# EAGLE board Camara_V4 (EAGLE 7.6.0)
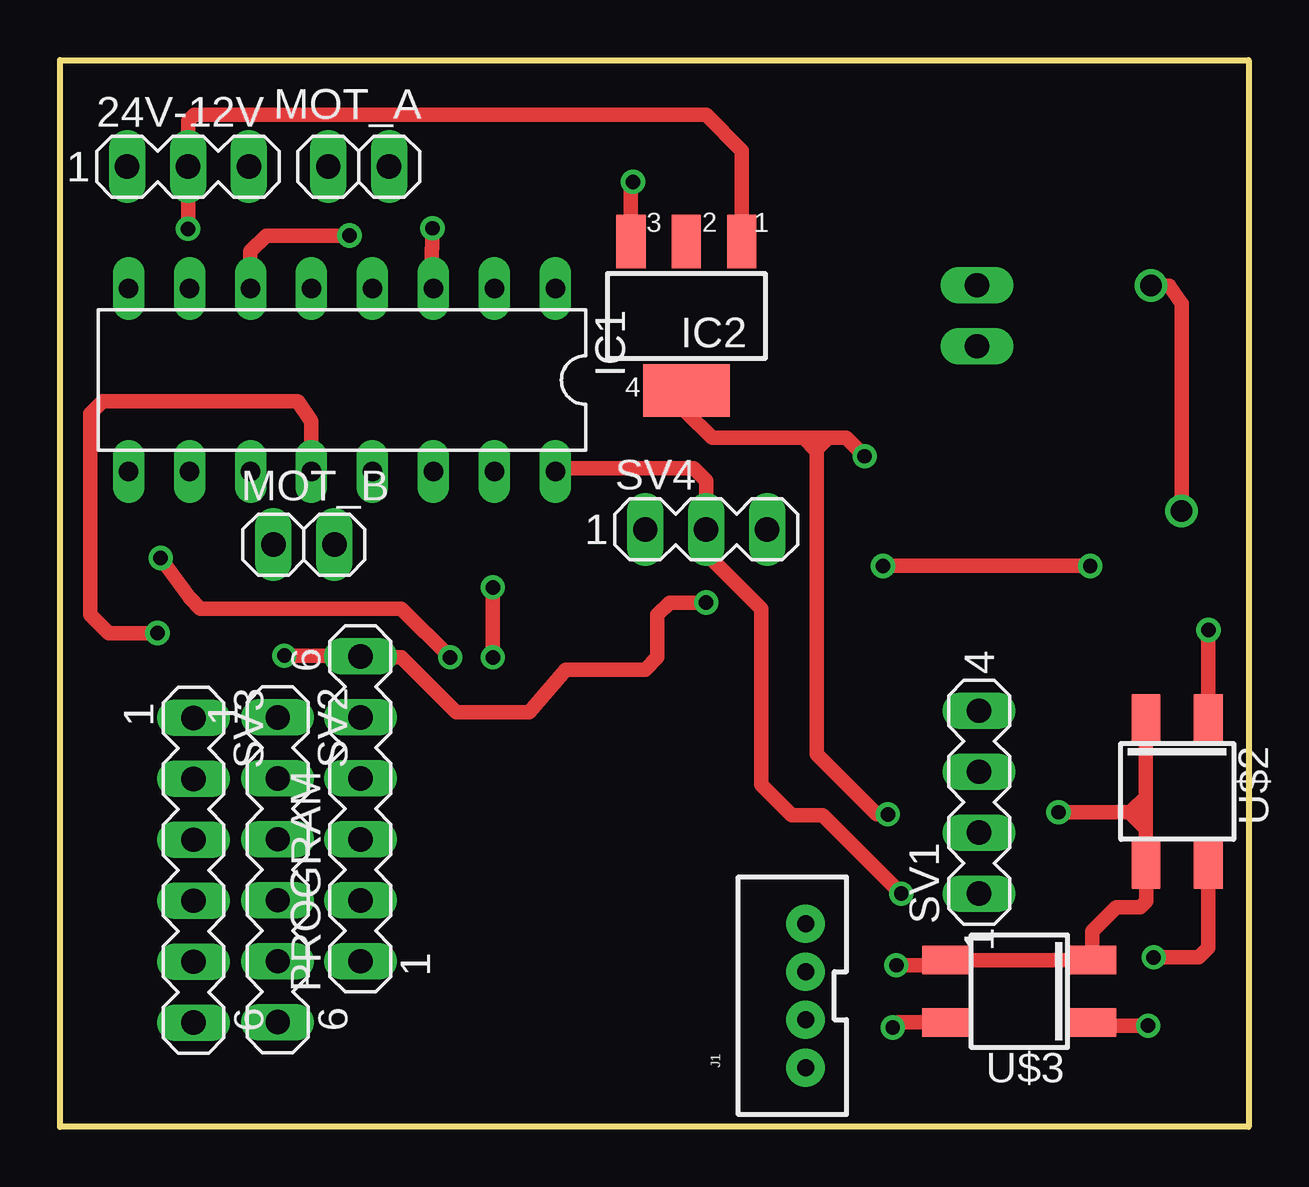
[diagram p0: board, top side]
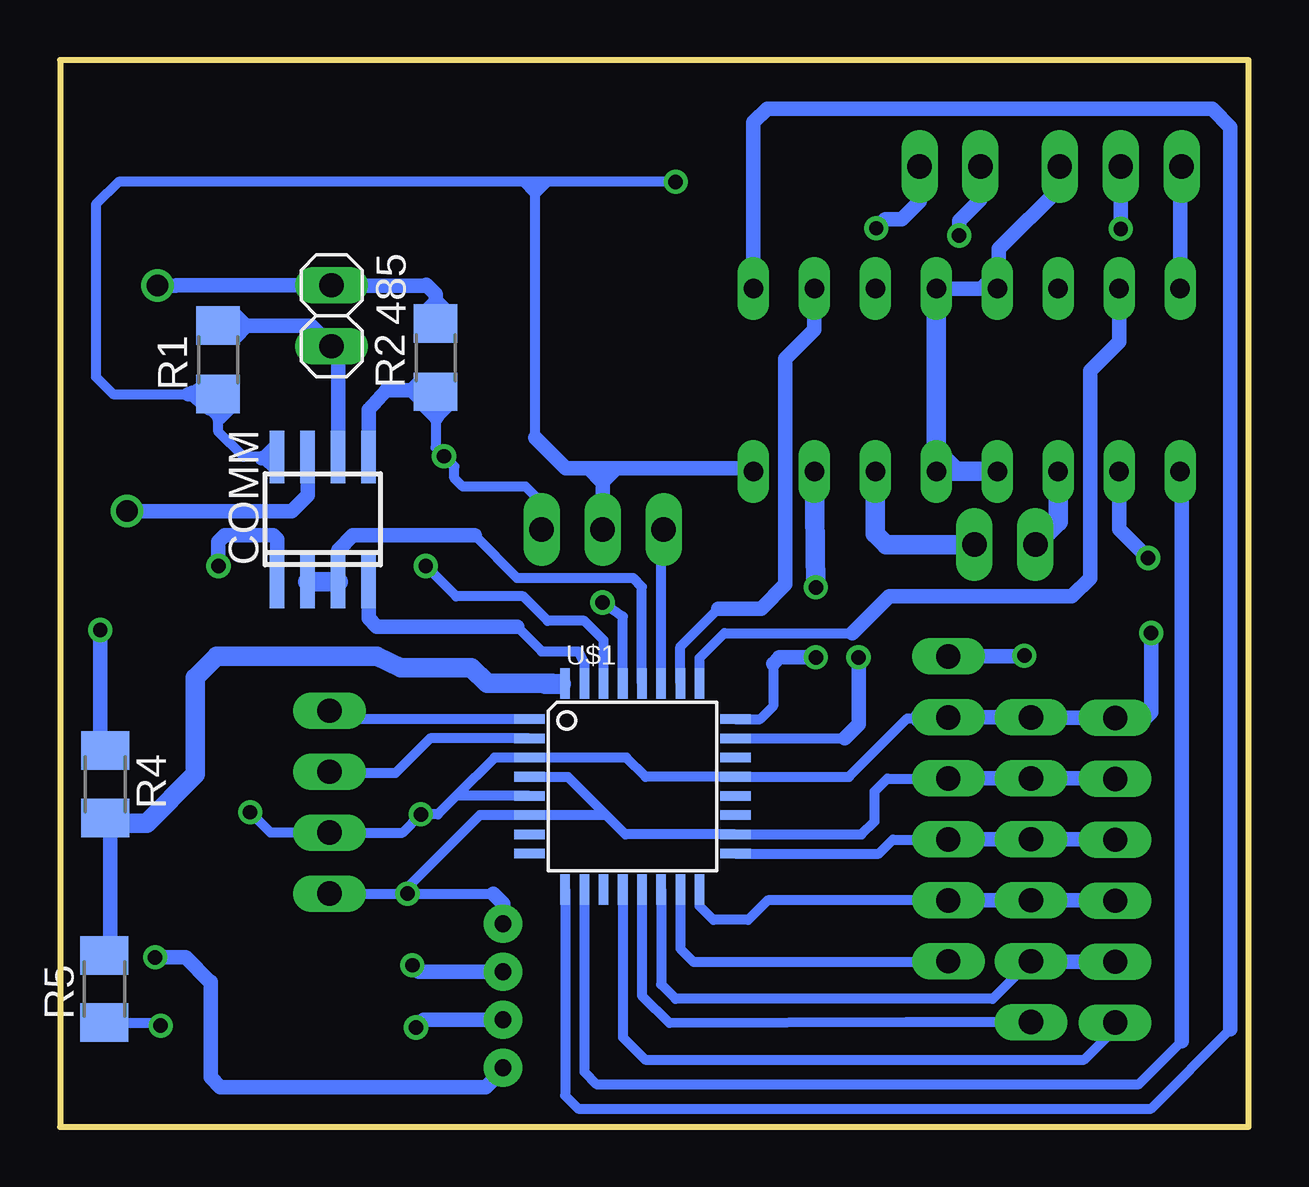
[diagram p1: board, bottom side, seen from below]

Size 49.53 x 44.45 mm. Coordinates in mm from the lower left corner, seen from the top.
Outline: 0,44.45 49.53,44.45 49.53,0 0,0 0,44.45
Copper layers (1*16): Top 0.035mm / dielectric 1.5mm / Bottom 0.035mm
Design rules "default": minimum track width 10mil, minimum drill 24mil, track to track 8mil, track to pad 8mil, pad to pad 8mil, via to via 8mil, smd to smd 8mil, copper to edge 40mil, drill to drill 8mil, minimum pad ring 10mil, minimum via ring 8mil, stop-mask expansion 4mil, vias tented up to drill 0mil, thermal gap 10mil

## Footprints (pad centres in the part's own frame; a part is rotated, then mirrored left to right if it is on the bottom)
MA03-1 = drill 1.016 long: 1 -2.54,0; 2 0,0; 3 2.54,0
CINVESTAV_1X02 = drill 1.016 long: 1 -1.27,0; 2 1.27,0
CINVESTAV_SOIC8 = smd 0.6 x 2.2: 1 -1.905,-2.6; 2 -0.635,-2.6; 3 0.635,-2.6; 4 1.905,-2.6; 5 1.905,2.6; 6 0.635,2.6; 7 -0.635,2.6; 8 -1.905,2.6
DIL16 = drill 0.813 long: 1 -8.89,-3.81; 2 -6.35,-3.81; 3 -3.81,-3.81; 4 -1.27,-3.81; 5 1.27,-3.81; 6 3.81,-3.81; 7 6.35,-3.81; 8 8.89,-3.81; 9 8.89,3.81; 10 6.35,3.81; 11 3.81,3.81; 12 1.27,3.81; 13 -1.27,3.81; 14 -3.81,3.81; 15 -6.35,3.81; 16 -8.89,3.81
SOT223 = smd 1.219 x 2.235: 1 -2.311,-3.099; 2 0,-3.099; 3 2.311,-3.099 | smd 3.6 x 2.2: 4 0,3.099
JST-4-PTH-VERT = drill 0.7 pad 1.6: 1 -3,-0.55; 2 -1,-0.55; 3 1,-0.55; 4 3,-0.55
MA06-1 = drill 1.016 long: 1 -6.35,0; 2 -3.81,0; 3 -1.27,0; 4 1.27,0; 5 3.81,0; 6 6.35,0
R1206 = smd 1.6 x 1.803: 1 -1.422,0; 2 1.422,0
M1206 = smd 1.6 x 2: 1 -1.4,0; 2 1.4,0
MA04-1 = drill 1.016 long: 1 -3.81,0; 2 -1.27,0; 3 1.27,0; 4 3.81,0
CINVESTAV_TQFP32-08 = smd 1.27 x 0.4: 1 -4.293,2.8; 2 -4.293,2; 3 -4.293,1.2; 4 -4.293,0.4; 5 -4.293,-0.4; 6 -4.293,-1.2; 7 -4.293,-2; 8 -4.293,-2.8; 17 4.293,-2.8; 18 4.293,-2; 19 4.293,-1.2; 20 4.293,-0.4; 21 4.293,0.4; 22 4.293,1.2; 23 4.293,2; 24 4.293,2.8 | smd 0.4 x 1.27: 9 -2.8,-4.293; 10 -2,-4.293; 11 -1.2,-4.293; 12 -0.4,-4.293; 13 0.4,-4.293; 14 1.2,-4.293; 15 2,-4.293; 16 2.8,-4.293; 25 2.8,4.293; 26 2,4.293; 27 1.2,4.293; 28 0.4,4.293; 29 -0.4,4.293; 30 -1.2,4.293; 31 -2,4.293; 32 -2.8,4.293
CINVESTAV_SOIC4 = smd 2 x 1.2: 1 -3.05,1.3; 2 -3.05,-1.3; 3 3.05,-1.3; 4 3.05,1.3

## Placement (x,y rotation side)
24V-12V  [MA03-1]  5.33,40 0 top
485  [CINVESTAV_1X02]  38.21,33.79 270 bottom
COMM  [CINVESTAV_SOIC8]  38.58,25.31 0 bottom
IC1  L293D  [DIL16]  11.75,31.11 180 top
IC2  LM340MP-05  [SOT223]  26.1,33.78 180 top
J1  [JST-4-PTH-VERT]  30.52,5.46 90 top
MOT_A  [CINVESTAV_1X02]  12.45,40 180 top
MOT_B  [CINVESTAV_1X02]  10.16,24.26 0 top
PROGRAM  [MA06-1]  12.52,13.25 90 top
R1  20K  [R1206]  42.94,31.96 90 bottom
R2  20K  [R1206]  33.88,32.05 90 bottom
R4  [M1206]  47.65,14.27 270 bottom
R5  [M1206]  47.68,5.74 90 bottom
SV1  [MA04-1]  38.29,13.53 90 top
SV2  [MA06-1]  9.07,10.71 270 top
SV3  [MA06-1]  5.56,10.69 270 top
SV4  [MA03-1]  26.92,24.89 0 top
U$1  [CINVESTAV_TQFP32-08]  25.68,14.18 0 bottom
U$2  CINVESTAV_KB354NT  [CINVESTAV_SOIC4]  46.55,13.98 270 top
U$3  CINVESTAV_KB354NT  [CINVESTAV_SOIC4]  39.97,5.65 180 top

## Library data of the parts
24V-12V PROGRAM SV1-SV4 = con-lstb; OC_FARNELL: unknown; OC_NEWARK: unknown
485 COMM MOT_A MOT_B U$1-U$3 = VUG
IC1 = st-microelectronics; MPN: L293D; OC_FARNELL: 9589619; OC_NEWARK: 56P8249
IC2 = linear
J1 = SparkFun-Connectors; PROD_ID: CONN-13251
R1 R2 = eagle-ltspice; SPICEMODEL: NONE; SPICEPREFIX: R
R4 R5 = resistor

## Nets
485_EN: COMM.2 COMM.3 U$1.28
+5V: COMM.8 IC1.16 IC2.3 J1.4 PROGRAM.4 R1.1 SV1.1 SV2.2 SV3.2 SV4.2 U$1.4 U$1.6 U$1.18
+12V: 24V-12V.2 IC2.1
+24V: 24V-12V.1 IC1.8
DIR1_A: IC1.2 U$1.26
DIR1_B: IC1.15 U$1.24
DIR2_A: IC1.7 U$1.25
DIR2_B: IC1.10 U$1.23
EN_A: IC1.1 U$1.9
EN_B: IC1.9 U$1.10
ENCODER_CS1: SV2.6 U$1.13
ENCODER_CS2: SV3.6 U$1.12
ENCODER_STATUS1: SV2.5 SV3.5 U$1.14
ENCODER_STATUS2: U$1.11
GND: 24V-12V.3 COMM.5 IC1.4 IC1.5 IC1.12 IC1.13 IC2.4 J1.3 PROGRAM.5 R2.1 SV1.2 SV2.1 SV3.1 SV4.3 U$1.3 U$1.5 U$1.21 U$2.2 U$2.3 U$3.2 U$3.3
LASER: R4.2 R5.2 U$1.32
LASEROUT1: J1.1 U$2.4
LASEROUT2: J1.2 U$3.4
MISO: PROGRAM.2 SV2.4 SV3.4 U$1.16
MOSI: PROGRAM.1 U$1.15
MOTOR1_A: IC1.3 MOT_A.1
MOTOR1_B: IC1.14 MOT_B.2
MOTOR2_A: IC1.6 MOT_A.2
MOTOR2_B: IC1.11 MOT_B.1
N$2: R4.1 U$2.1
N$3: 485.2 COMM.6 R1.2
N$4: 485.1 COMM.7 R2.2
N$8: R5.1 U$3.1
PWM_ILUM: SV1.4 U$1.1
REFLEC: SV1.3 U$1.2
RST: PROGRAM.6 U$1.29
RX: COMM.1 U$1.30
SCK: PROGRAM.3 SV2.3 SV3.3 U$1.17
TX: COMM.4 U$1.31
TXCAMARA: SV4.1 U$1.27

## Tracks (layer width: path | path; a pad name or v marks a point on that pad's centre or on a via)
485_EN
  Bottom 0.406: U$1.28 25.28,22.49 25.65,22.86 30.48,22.86 32.26,24.64
  Bottom 0.61: 32.26,24.64 37.34,24.64 37.95,24.03 COMM.3
  Bottom 0.813: COMM.3 COMM.2
+5V  (via drill 0.6)
  Top 0.406: 20.76,27.43 IC1.16 | 23.79,39.28 v23.88,39.37
  Top 0.61: 20.76,27.43 26.42,27.43 26.92,26.92 SV4.2 26.92,23.88 29.21,21.59 29.21,14.25 30.48,12.98 31.78,12.98 v35.05,9.72 | IC2.3 23.79,39.28
  Bottom 0.406: PROGRAM.4 15.05,14.51 15.59,13.97 15.59,12.73 16.14,12.18 U$1.18 25.97,12.18 26.77,12.98 | SV2.2 | 5.58,14.52 SV3.2 | 26.77,12.98 U$1.6 | U$1.4 28.37,14.58 26.77,12.98 | U$1.6 | COMM.8 41.88,27.91 42.93,28.96 42.93,30.52 R1.1 | 29.72,28.7 29.72,38.86 | 29.72,38.86 29.72,39.37 | v23.88,39.37 29.21,39.37 | 29.21,39.37 29.72,39.37 | 29.72,39.37 30.23,39.37 | 30.23,39.37 47.09,39.37 48.03,38.43 48.03,31.24 47.32,30.53 44.2,30.53 43.59,30.94 | 43.69,30.53 43.61,30.46 | SV1.1 35.31,9.72 | 35.31,9.72 v35.05,9.72 31.48,9.72 | U$1.6 32.04,12.98 35.31,9.72 | 29.21,39.37 29.72,38.86 | 29.72,38.86 30.23,39.37
  Bottom 0.61: PROGRAM.4 SV2.2 | SV2.2 5.58,14.52 | 29.72,28.7 28.45,27.43 27.51,27.43 | 27.51,27.43 26.98,27.43 | 26.98,27.43 20.76,27.43 IC1.16 | 44.2,30.53 43.69,30.53 | 43.61,30.46 43.02,30.46 R1.1 | SV4.2 26.92,27.38 26.98,27.43 | 26.98,26.9 27.51,27.43 | J1.4 31.07,9.3 31.48,9.72
+12V  (via drill 0.6)
  Top 0.61: IC2.1 28.41,40.68 26.92,42.16 5.59,42.16 5.33,41.91 v5.33,37.41
  Bottom 0.61: 24V-12V.2 v5.33,37.41
+24V
  Bottom 0.406: 2.86,39.94 24V-12V.1
  Bottom 0.61: IC1.8 2.86,39.94
DIR1_A
  Bottom 0.406: U$1.26 23.68,20.01 22.1,21.59
  Bottom 0.61: 22.1,21.59 20.32,21.59 19.3,22.61 19.3,32 18.1,33.21 IC1.2
DIR1_B  (via drill 0.6)
  Top 0.61: v18.03,19.56 v18.03,22.48
  Bottom 0.406: 19.81,19.3 19.81,17.53 20.35,16.98 U$1.24
  Bottom 0.61: v18.03,19.56 19.56,19.56 19.81,19.3
  Bottom 0.813: v18.03,22.48 IC1.15
DIR2_A
  Bottom 0.406: U$1.25 22.88,19.54 21.84,20.57 16.51,20.57
  Bottom 0.61: 16.51,20.57 14.99,22.1 7.37,22.1 6.6,22.86 6.6,31.5 5.4,32.7 IC1.7
DIR2_B  (via drill 0.6)
  Top 0.61: v16.26,19.56 14.22,21.59 5.84,21.59 5.4,22.03 v4.19,23.7
  Bottom 0.406: U$1.23 16.84,16.18
  Bottom 0.61: 16.84,16.18 16.26,16.76 v16.26,19.56 | IC1.10 5.4,24.9 v4.19,23.7
EN_A
  Bottom 0.406: 0.76,4.06 4.06,0.76 27.94,0.76 28.48,1.3 U$1.9
  Bottom 0.61: IC1.1 20.64,41.85 20.07,42.42 1.52,42.42 0.76,41.66 0.76,4.06
EN_B
  Bottom 0.406: U$1.10 27.68,7.63 27.69,2.29 27.18,1.78 4.57,1.78 2.79,3.56
  Bottom 0.61: 2.79,3.56 2.79,27.24 IC1.9
ENCODER_CS1
  Bottom 0.406: SV2.6 14.27,4.36 24.13,4.32 25.28,5.47 U$1.13
ENCODER_CS2
  Bottom 0.406: U$1.12 26.08,3.73 25.15,2.79 6.86,2.79 5.59,4.06
  Bottom 0.61: 5.59,4.06 SV3.6
ENCODER_STATUS1
  Bottom 0.406: 9.05,6.88 SV2.5 9.1,6.9 10.67,5.33 23.88,5.33 24.48,5.94 U$1.14
  Bottom 0.61: SV3.5 9.05,6.88
GND  (via drill 0.6)
  Top 0.406: IC2.4 26.1,29.78 | 45.26,10.91 U$2.3 | 45.02,13.11 45.25,12.88 | 36.7,6.73 U$3.3
  Top 0.61: 26.1,29.78 27.18,28.7 30.99,28.7 | v4.06,20.57 2.03,20.57 1.27,21.34 1.27,29.72 1.78,30.23 9.91,30.23 10.48,29.4 IC1.12 | 45.26,10.91 45.26,9.4 45.01,9.14 44.02,9.14 43.02,8.15 U$3.2 U$3.3 | U$2.3 45.25,12.88 U$2.2 | v41.61,13.11 45.02,13.11 | v34.85,6.73 36.7,6.73 | v34.49,13.02 34.04,13.02 31.52,15.53 31.52,28.17 31.5,28.19 | 31.5,28.19 30.99,28.7 | 30.99,28.7 32,28.7 | 32,28.7 32.77,28.7 v33.53,27.94 | 31.5,28.19 32,28.7
  Bottom 0.406: U$1.5 33.02,13.78 | 33.02,13.78 31.42,15.38 U$1.3 25.93,15.39 25.13,14.58 U$1.21 16.66,14.58 14.22,17.02 13.72,17.02 | 12.95,34.99 IC1.4 | 33.91,30.68 R2.1 33.88,28.3 v33.53,27.94 33.1,27.51 33.1,27.03 32.74,26.67 30.12,26.67 29.46,26.01 SV4.3 | 41.52,13.02 v41.61,13.11 40.75,12.26 SV1.2 35.26,12.26 v34.49,13.02 33.79,13.02 33.02,13.78 | 34.77,6.81 v34.85,6.73
  Bottom 0.61: IC1.4 IC1.5 10.41,34.99 10.41,36.58 7.87,39.12 | COMM.5 36.68,29.87 35.94,30.68 33.91,30.68 | v4.06,20.57 4.06,17.27 4.32,17.02 5.54,17.02 SV3.1 9.05,17.04 SV2.1 PROGRAM.5 | PROGRAM.5 13.68,17.06 | J1.3 34.58,6.46 v34.85,6.73
  Bottom 0.813: IC1.4 IC1.13 IC1.12 | 24V-12V.3 7.87,39.12 | PROGRAM.5 | 13.72,17.02 13.68,17.06
LASER
  Bottom 0.254: U$1.32 29,18.48 29.01,18.47
  Bottom 0.406: 47.43,12.65 R4.2 | 47.43,7.4 R5.2
  Bottom 0.61: 47.43,12.65 47.43,7.4
  Bottom 0.813: 47.43,12.65 45.92,12.65 43.89,14.68 43.89,18.72 43,19.61 36.32,19.61 35.33,19.13 32.39,19.13 31.74,18.48 29.02,18.48 29.01,18.47
LASEROUT1  (via drill 0.6)
  Top 0.61: v45.57,7.06 47.45,7.06 47.85,7.47 U$2.4
  Bottom 0.61: v45.57,7.06 44.3,7.06 43.28,6.04 43.26,6.04 43.26,2.06 42.85,1.65 31.79,1.65 31.07,2.37 J1.1
LASEROUT2  (via drill 0.6)
  Top 0.61: U$3.4 34.91,4.35 v34.7,4.14
  Bottom 0.61: J1.2 34.38,4.46 v34.7,4.14
MISO
  Bottom 0.406: SV2.4 | 5.58,9.44 SV3.4 | PROGRAM.2 20.05,9.44 20.86,8.62 22.3,8.62 22.88,9.2 U$1.16
  Bottom 0.61: PROGRAM.2 SV2.4 | SV2.4 5.58,9.44
MOSI
  Bottom 0.406: PROGRAM.1 12.56,6.86 23.11,6.86 23.68,7.42 U$1.15
MOTOR1_A  (via drill 0.6)
  Top 0.61: IC1.3 15.49,34.99 15.49,36.58 15.52,36.6 v15.52,37.44
  Bottom 0.61: MOT_A.1 13.72,38.56 14.45,37.82 15.14,37.82 v15.52,37.44
MOTOR1_B
  Bottom 0.813: MOT_B.2 15.11,24.26 15.56,24.7 IC1.14
MOTOR2_A  (via drill 0.6)
  Top 0.61: IC1.6 7.93,36.47 8.59,37.13 v12.07,37.13
  Bottom 0.61: MOT_A.2 11.18,38.63 12.07,37.74 v12.07,37.13
MOTOR2_B
  Bottom 0.813: IC1.11 7.94,25.21 MOT_B.1
N$2  (via drill 0.6)
  Top 0.61: U$2.1 47.85,19.43 v47.85,20.7
  Bottom 0.406: 47.85,15.88 R4.1
  Bottom 0.61: v47.85,20.7 47.85,15.88
N$3
  Bottom 0.61: R1.2 39.07,33.38 485.2 37.95,32.26 COMM.6
N$4  (via drill 0.9)
  Top 0.61: v45.47,35.05 46.23,35.05 46.74,34.29 v46.74,25.65
  Bottom 0.406: 38.2,35.05 485.1 | 44.7,35.05 44.69,35.06
  Bottom 0.61: 485.1 44.69,35.06 | v45.47,35.05 44.7,35.05 | R2.2 33.88,34.7 34.27,35.08 34.29,35.05 38.2,35.05 | v46.74,25.65 39.88,25.65 39.22,26.32 COMM.7
N$8  (via drill 0.6)
  Top 0.406: 43.15,4.22 U$3.1
  Top 0.61: v45.34,4.22 43.15,4.22
  Bottom 0.406: R5.1 45.47,4.34 v45.34,4.22
N$28
  Bottom 0.406: 43.49,30.05 44.17,30.5
  Bottom 0.61: 43.46,30.05 43.49,30.05 | 43.49,30.05 43.54,30.05 | 44.02,30.56 43.49,30.05
N$29
  Bottom 0.61: 44.02,30.58 43.31,29.95
N$30
  Bottom 0.406: 41,28.02 40.54,28.47
N$31
  Bottom 0.406: 41.1,27.86 40.54,27.31
  Bottom 0.61: 41.12,27.86 41.1,27.86
N$32
  Bottom 0.61: 34.44,31.09 34.47,31.09 34.82,30.73 34.82,30.66 34.37,30.2
N$33
  Bottom 0.61: 33.81,29.62 33.81,29.64 33.43,30.02
N$34
  Bottom 0.61: 33.86,29.54 33.86,29.57 34.34,30.05
N$35
  Bottom 0.61: 42.29,33.81 42.29,33.78 41.94,33.43
N$36
  Bottom 0.61: 42.22,32.94 42.19,32.94 41.78,33.35
N$37
  Bottom 0.61: 41.73,33.38 41.78,33.38 42.24,33.83
N$38
  Bottom 0.61: 42.52,30.15 42.52,29.92 42.9,29.54
N$39
  Bottom 0.406: 43.46,30.05 43,29.59
  Bottom 0.61: 43.46,30.15 43.46,30.05
N$40
  Bottom 0.61: 12.93,28.07 12.93,27.76
  Bottom 0.813: 12.27,27.41 12.93,28.07
N$41
  Bottom 0.61: 10.52,35.59 10.52,35.56 11.02,35.05
N$46
  Bottom 0.61: 26.9,26.9 26.42,27.38
N$47
  Bottom 0.61: 33.35,33.93 33.4,33.93 33.86,34.39 34.34,33.91
N$60
  Bottom 0.813: 28.68,18.44 29.31,18.44
N$61
  Bottom 0.813: 28.65,18.47 29.31,18.47
N$62
  Top 0.61: 44.7,13.21 45.21,13.72 45.21,12.45 44.7,12.95
PWM_ILUM
  Bottom 0.406: U$1.1 37.94,16.98 SV1.4
REFLEC
  Bottom 0.406: U$1.2 34.11,16.18 35.56,14.73 38.23,14.73 SV1.3
RST  (via drill 0.6)
  Top 0.61: v26.92,21.84 25.4,21.84 24.89,21.34 24.89,19.56 24.38,19.05 21.08,19.05 19.56,17.27 16.51,17.27 14.22,19.56 13.72,19.56 | v9.35,19.63 13.64,19.63 13.68,19.6
  Top 0.813: 13.68,19.6 13.72,19.56
  Bottom 0.406: U$1.29 26.08,21.25 v26.92,21.84
  Bottom 0.61: PROGRAM.6 9.38,19.6 v9.35,19.63
RX  (via drill 0.6)
  Top 0.61: v34.29,23.37 v42.93,23.37
  Bottom 0.406: U$1.30 26.88,20.28 27.69,21.08 29.21,21.08 30.23,22.1 33.02,22.1 v34.29,23.37
  Bottom 0.61: COMM.1 40.49,24.48 40.64,24.64 42.67,24.64 42.93,24.38 v42.93,23.37
SCK
  Bottom 0.406: U$1.17 15.41,11.38 14.83,11.96 12.53,11.96 PROGRAM.3 | SV2.3 | 5.58,11.98 SV3.3
  Bottom 0.61: PROGRAM.3 SV2.3 | SV2.3 5.58,11.98
TX
  Bottom 0.406: 30.48,20.83 29.46,19.81 27.94,19.81 27.69,19.3 U$1.31
  Bottom 0.61: COMM.4 36.68,21.18 36.32,20.83 30.48,20.83
TXCAMARA
  Bottom 0.406: U$1.27 24.48,24.29
  Bottom 0.61: 24.48,24.29 SV4.1